# Altium PCB 起跑突击V4.2.PcbDoc
Units mil, origin at the board's own origin, x right, y up, seen from the top; angles counter-clockwise.
Board outline 6000 x 4000 mil, 2 copper layers (Top Layer, Bottom Layer); 32 components, 4 nets, 76 pads, 0 vias.
Unrouted connection lines stored in the file: 2.
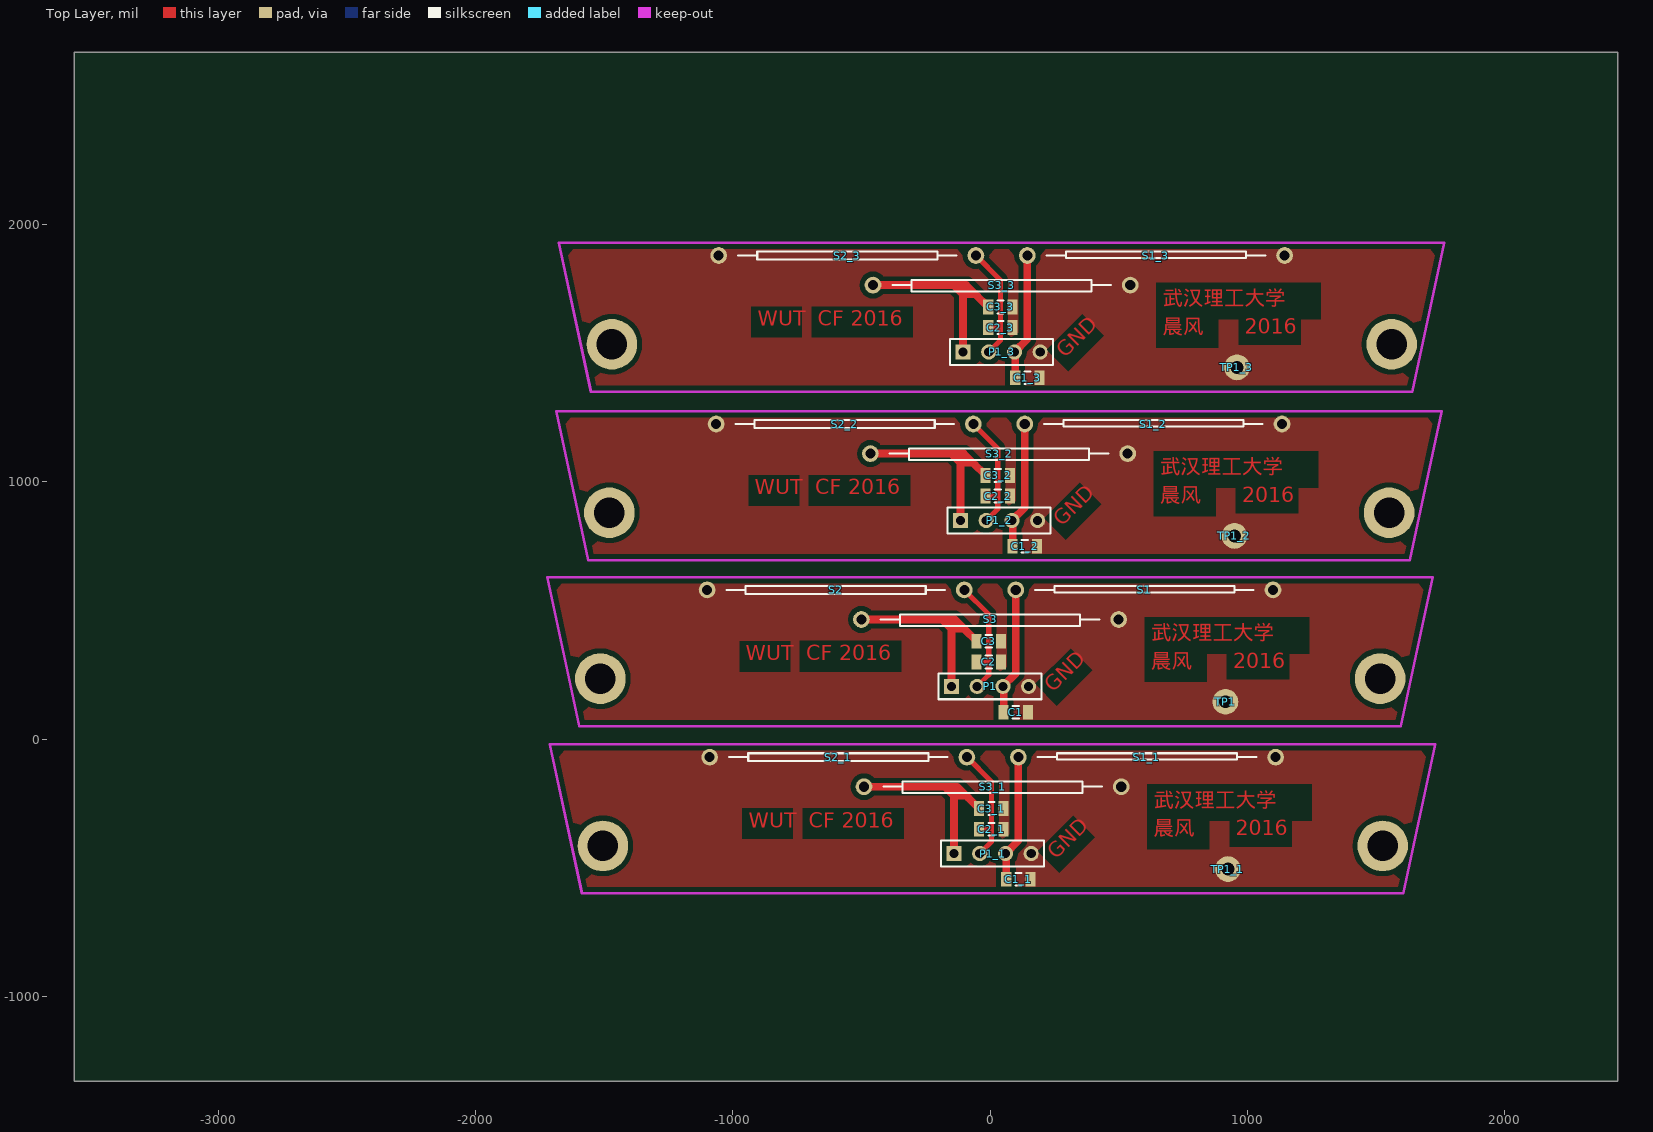
[diagram p0: Top Layer view]
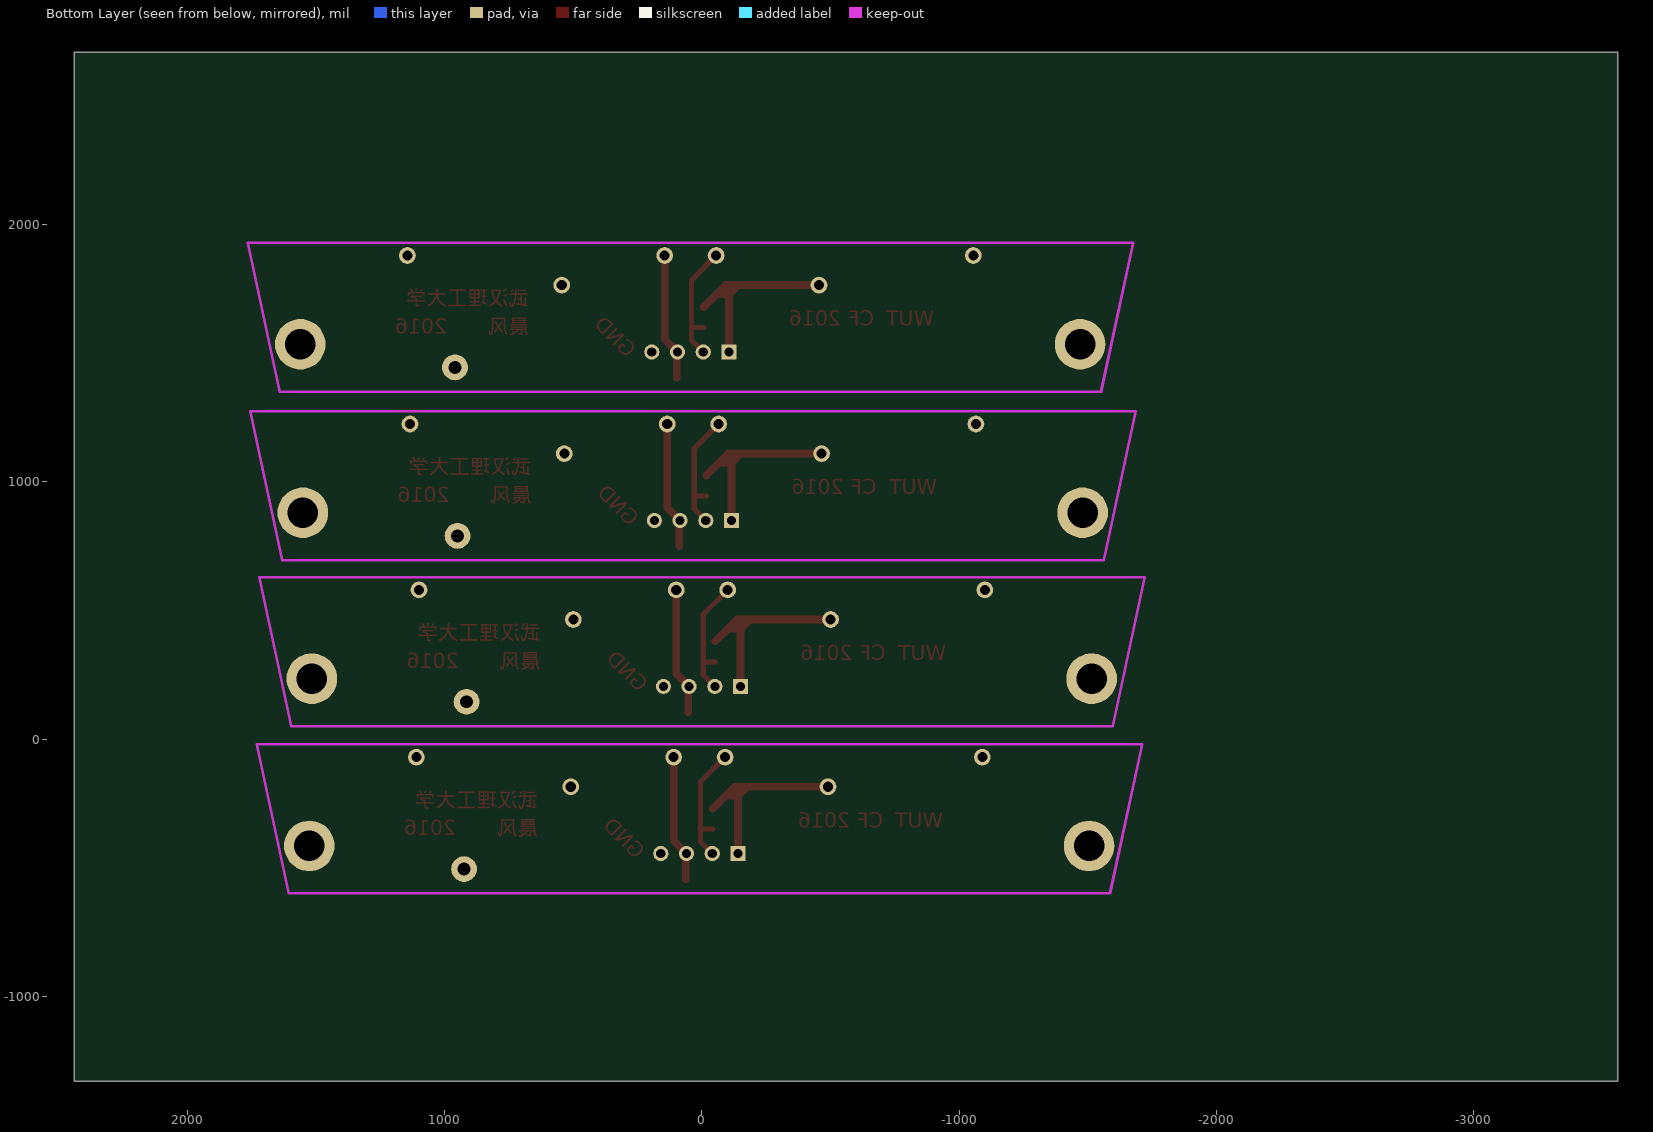
[diagram p1: Bottom Layer view, seen from below]

## Layer stack, top to bottom
Top Layer: signal copper 1.4
Dielectric: dielectric 12.6, FR-4, Dk 4.8
Bottom Layer: signal copper 1.4

## Board outline
-3560,-1330 2440,-1330 2440,2670 -3560,2670

## Design rules (kind name [scope] priority, off if disabled: settings)
Clearance [All] p1: gap=20
PolygonConnect [All] p1: connectstyle=Direct reliefconductorwidth=10 reliefentries=4 polygonreliefangle="90 Angle" airgapwidth=10
RoutingVias [All] p1: holewidth=28 width=50 viastyle="Through Hole" minholewidth=28 minwidth=50 maxholewidth=28 maxwidth=50
SolderMaskExpansion [All] p1: expansion=4
Width [All] p1: maxlimit=50 minlimit=20 preferedwidth=30 minimp=50.000000 maximp=50.000000 favimp=50.000000
28 further rules are at their usual default settings.

## Classes and differential pairs
component class 起跑突击V4.0: C1 C2 C3 P1 S1 S2 S3 TP1

## Components (designator, comment, footprint, x,y, rotation, side; value= is the part's Value field where it differs from the comment)
C1 "Cap" C2012 100,105 r0 top
C1_1 "Cap" C2012 110,-545 r0 top (schematic designator C1)
C1_2 "Cap" C2012 135,750 r0 top (schematic designator C1)
C1_3 "Cap" C2012 145,1405 r0 top (schematic designator C1)
C2 "Cap" C2012 -5,300 r0 top
C2_1 "Cap" C2012 5,-350 r0 top (schematic designator C2)
C2_2 "Cap" C2012 30,945 r0 top (schematic designator C2)
C2_3 "Cap" C2012 40,1600 r0 top (schematic designator C2)
C3 "Cap" C2012 -5,380 r0 top
C3_1 "Cap" C2012 5,-270 r0 top (schematic designator C3)
C3_2 "Cap" C2012 30,1025 r0 top (schematic designator C3)
C3_3 "Cap" C2012 40,1680 r0 top (schematic designator C3)
P1 "Header 4" HDR1X4 -150,205 r0 top
P1_1 "Header 4" HDR1X4 -140,-445 r0 top (schematic designator P1)
P1_2 "Header 4" HDR1X4 -115,850 r0 top (schematic designator P1)
P1_3 "Header 4" HDR1X4 -105,1505 r0 top (schematic designator P1)
S1 "SW-PB" AXIAL-1.0 600,580 r0 top
S1_1 "SW-PB" AXIAL-1.0 610,-70 r0 top (schematic designator S1)
S1_2 "SW-PB" AXIAL-1.0 635,1225 r0 top (schematic designator S1)
S1_3 "SW-PB" AXIAL-1.0 645,1880 r0 top (schematic designator S1)
S2 "SW-PB" AXIAL-1.0 -600,580 r180 top
S2_1 "SW-PB" AXIAL-1.0 -590,-70 r180 top (schematic designator S2)
S2_2 "SW-PB" AXIAL-1.0 -565,1225 r180 top (schematic designator S2)
S2_3 "SW-PB" AXIAL-1.0 -555,1880 r180 top (schematic designator S2)
S3 "SW-PB" AXIAL-1.0 0,465 r0 top
S3_1 "SW-PB" AXIAL-1.0 10,-185 r0 top (schematic designator S3)
S3_2 "SW-PB" AXIAL-1.0 35,1110 r0 top (schematic designator S3)
S3_3 "SW-PB" AXIAL-1.0 45,1765 r0 top (schematic designator S3)
TP1 "TEST PAD" PIN 915,145 r0 top
TP1_1 "TEST PAD" PIN 925,-505 r0 top (schematic designator TP1)
TP1_2 "TEST PAD" PIN 950,790 r0 top (schematic designator TP1)
TP1_3 "TEST PAD" PIN 960,1445 r0 top (schematic designator TP1)

## Footprints (in the part's own frame and the unit in brackets; to place one, negate y for a bottom-side part, rotate by r counter-clockwise, add the part's x,y. Pads: shape width x height; smd on the part's side, far side on the other; paste and mask are expansions set on the pad)
AXIAL-1.0 [mm] "Axial Device, Thru-Hole; 2 Leads; 1.0 in Pin Spacing"
  round 1.65 hole 1: 1(-12.7,0) 2(12.7,0)
  silkscreen extent -10.79,-0.25 10.79,0.38
C2012 [mm] "Chip Capacitor, 2-Leads, Body 2.0x1.2mm, IPC Low Density"
  rect 1x1.45 smd: 1(-1.2,0) 2(1.2,0)
  silkscreen extent -0.3,-0.63 0.3,0.63, body extent -0.98,-0.6 1.02,0.6, height 0.5
HDR1X4 [mm] "Connector; Header; 4 Position"
  rect 1.5x1.5 hole 0.9: 1(0,0)
  round 1.5 hole 0.9: 2(2.54,0) 3(5.08,0) 4(7.62,0)
  silkscreen extent -1.27,-1.27 8.89,1.27, body extent -1.27,-1.27 8.89,1.27, height 7.58
PIN [mil]
  round 100 hole 50: 1(0,0)

## Part data
C1 C1_1 C1_2 C1_3 C2 C2_1 C2_2 C2_3 C3 C3_1 C3_2 C3_3: "贴片电容"
P1 P1_1 P1_2 P1_3: "Header, 4-Pin"
S1 S1_1 S1_2 S1_3 S2 S2_1 S2_2 S2_3 S3 S3_1 S3_2 S3_3: "Switch"

## Free pads (board coordinates)
  round 196.85 hole 118.11: 0(1516.5,235) 0(1526.5,-415) 0(1551.5,880) 0(1561.5,1535) 1(-1515,235) 1(-1505,-415) 1(-1480,880) 1(-1470,1535)

## Nets (pads, with @x,y where several pads share a name; then routed paths per layer and width w, separated by ;. In a path a pad name is that pad's centre, name@x,y a point inside that pad or via, vN(x,y) a via of type N, cw(c..) or ccw(c..) an arc to the next point about the centre after c; other vN are vias at no path point)
GND: C1.2 C2.2 C3.2 P1.4 S1.2 S2.2 S3.2 TP1.1
IO1: C1.1 P1.3 S1.1 | length 496.9
  Top Layer w30: C1.1 52.76,202.24 P1.3 100,255 S1.1
IO2: C2.1 P1.2 S2.1 | length 480.2
  Top Layer w20: S2.1 -5,485 -5,300 ; C2.1 -5,300 ; P1.2 -5,250 -5,300
IO3: C3.1 P1.1 S3.1 | length 857.7
  Top Layer w30: S3.1 -185,465 ; P1.1 -150,430 ; -93.62,421.38 -102.24,430 ; C3.1 -102.24,430 ; -185,465 -137.24,465 ; -185,465 -150,430 ; -150,430 -150,452.24 -137.24,465 ; -150,430 -102.24,430 ; -137.24,465 -102.24,430
pads on no net: C1_1.1 C1_1.2 C1_2.1 C1_2.2 C1_3.1 C1_3.2 C2_1.1 C2_1.2 C2_2.1 C2_2.2 C2_3.1 C2_3.2 C3_1.1 C3_1.2 C3_2.1 C3_2.2 C3_3.1 C3_3.2 P1_1.1 P1_1.2 P1_1.3 P1_1.4 P1_2.1 P1_2.2 P1_2.3 P1_2.4 P1_3.1 P1_3.2 P1_3.3 P1_3.4 S1_1.1 S1_1.2 S1_2.1 S1_2.2 S1_3.1 S1_3.2 S2_1.1 S2_1.2 S2_2.1 S2_2.2 S2_3.1 S2_3.2 S3_1.1 S3_1.2 S3_2.1 S3_2.2 S3_3.1 S3_3.2 TP1_1.1 TP1_2.1 TP1_3.1
copper on no net: | length 5504.3
  Top Layer w20: -90,-70 5,-165 5,-350 ; -65,1225 30,1130 30,945 ; -55,1880 40,1785 40,1600 ; -42.24,-350 5,-350 ; -40,-445 5,-400 5,-350 ; -17.24,945 30,945 ; -15,850 30,895 30,945 ; -7.24,1600 40,1600 ; -5,1505 40,1550 40,1600
  Top Layer w30: -490,-185 -175,-185 ; -465,1110 -150,1110 ; -455,1765 -140,1765 ; -140,-445 -140,-220 ; -115,850 -115,1075 ; -105,1505 -105,1730 ; -83.62,-228.62 -92.24,-220 ; -58.62,1066.38 -67.24,1075 ; -48.62,1721.38 -57.24,1730 ; -42.24,-270 -92.24,-220 ; -17.24,1025 -67.24,1075 ; -7.24,1680 -57.24,1730 ; 62.76,-545 62.76,-447.76 60,-445 110,-395 110,-70 ; 87.76,750 87.76,847.24 85,850 135,900 135,1225 ; 97.76,1405 97.76,1502.24 95,1505 145,1555 145,1880 ; -175,-185 -140,-220 ; -175,-185 -127.24,-185 ; -150,1110 -115,1075 ; -150,1110 -102.24,1110 ; -140,-220 -92.24,-220 ; -140,-220 -140,-197.76 -127.24,-185 ; -140,1765 -105,1730 ; -140,1765 -92.24,1765 ; -127.24,-185 -92.24,-220 ; -115,1075 -67.24,1075 ; -115,1075 -115,1097.24 -102.24,1110 ; -105,1730 -57.24,1730 ; -105,1730 -105,1752.24 -92.24,1765 ; -102.24,1110 -67.24,1075 ; -92.24,1765 -57.24,1730

## Polygon pours and split planes (outlines as drawn)
no net on Top Layer "Top Layer-GND" (solid, remove dead copper, pour order 6): -1670,1930 1766.34,1930 1766.34,1475 1641.34,1350 -1551.34,1350
no net on Top Layer "Top Layer-GND" (solid, remove dead copper, pour order 6): -1680,1275 1756.34,1275 1756.34,820 1631.34,695 -1561.34,695
no net on Top Layer "Top Layer-GND" (solid, remove dead copper, pour order 6): -1705,-20 1731.34,-20 1731.34,-475 1606.34,-600 -1586.34,-600
GND on Top Layer "Top Layer-GND" (solid, remove dead copper, pour order 6): -1715,630 1721.34,630 1721.34,175 1596.34,50 -1596.34,50

## Keep-outs
Keep-Out Layer:
  lines w10: -1721.34,630 -1596.34,50 1596.34,50 1721.34,630 -1721.34,630 ; -1711.34,-20 1731.34,-20 1606.34,-600 -1586.34,-600 -1711.34,-20 ; -1686.34,1275 1756.34,1275 1631.34,695 -1561.34,695 -1686.34,1275 ; -1676.34,1930 1766.34,1930 1641.34,1350 -1551.34,1350 -1676.34,1930

## Other copper
Top Layer:
  text "武汉理工大学" at 671,1666.59 h100
  text "WUT" at -904,1586.59 h100
  text "CF 2016" at -669,1586.59 h100
  text "晨风" at 671,1556.59 h100
  text "2016" at 991,1556.59 h100
  text "GND" at 305,1465 h100 r45
  text "武汉理工大学" at 661,1011.59 h100
  text "WUT" at -914,931.59 h100
  text "CF 2016" at -679,931.59 h100
  text "晨风" at 661,901.59 h100
  text "2016" at 981,901.59 h100
  text "GND" at 295,810 h100 r45
  text "武汉理工大学" at 626,366.59 h100
  text "WUT" at -949,286.59 h100
  text "CF 2016" at -714,286.59 h100
  text "晨风" at 626,256.59 h100
  text "2016" at 946,256.59 h100
  text "GND" at 260,165 h100 r45
  text "武汉理工大学" at 636,-283.41 h100
  text "WUT" at -939,-363.41 h100
  text "CF 2016" at -704,-363.41 h100
  text "晨风" at 636,-393.41 h100
  text "2016" at 956,-393.41 h100
  text "GND" at 270,-485 h100 r45